# EAGLE board ps_723_reber_si2 (EAGLE 7.2.0)
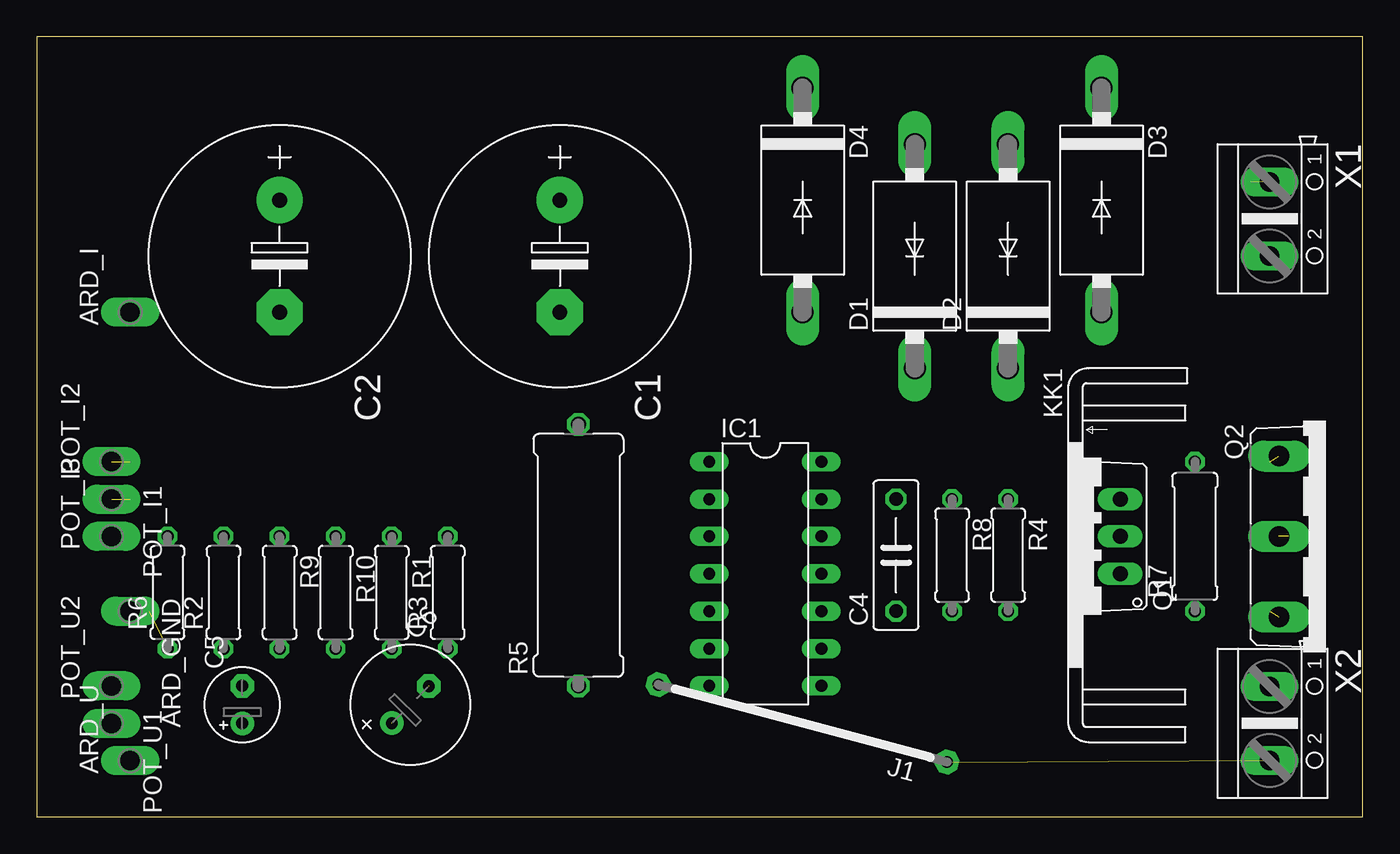
[diagram p0: board, top side]
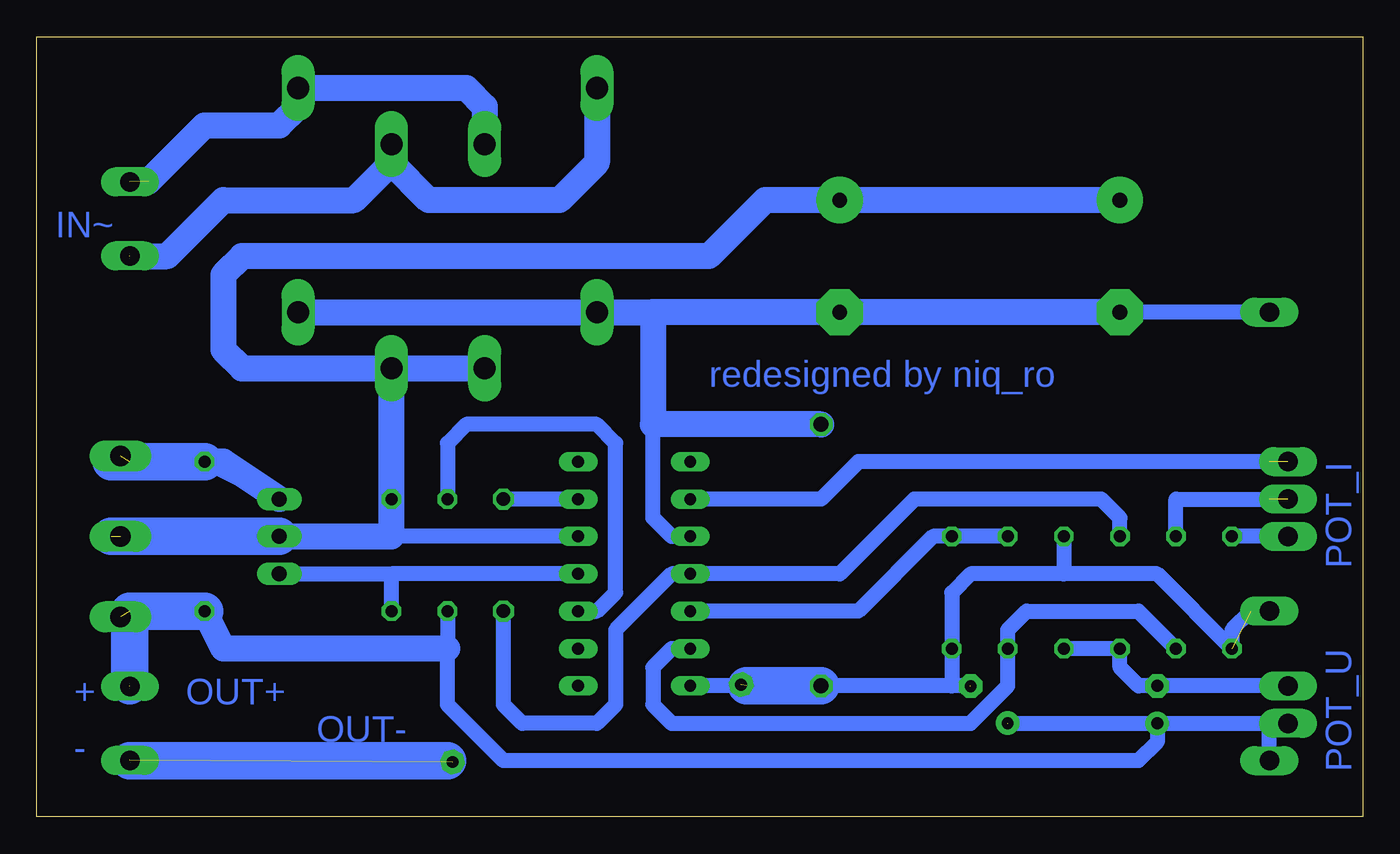
[diagram p1: board, bottom side, seen from below]

Size 90.15 x 53.01 mm. Coordinates in mm from the lower left corner, seen from the top.
Outline: 0,0 90.15,0 90.15,53.01 0,53.01 0,0
Copper layers (1*16): Top 0.035mm / dielectric 1.5mm / Bottom 0.035mm
Design rules "default": minimum track width 10mil, minimum drill 24mil, track to track 8mil, track to pad 8mil, pad to pad 8mil, via to via 8mil, smd to smd 8mil, copper to edge 40mil, drill to drill 8mil, minimum pad ring 10mil, minimum via ring 8mil, stop-mask expansion 4mil, vias tented up to drill 0mil, thermal gap 10mil

## Footprints (pad centres in the part's own frame; a part is rotated, then mirrored left to right if it is on the bottom)
P1-13Y = drill 1.321 pad 1.905 long: TP 0,0
E7,5-18 = drill 1.016 pad 3.15: + -3.81,0 | drill 1.016 pad 3.15 octagon: - 3.81,0
C075-032X103 = drill 0.914 octagon: 1 -3.81,0; 2 3.81,0
E2,5-5 = drill 0.813 pad 1.6: + -1.27,0 | drill 0.813 pad 1.6 octagon: - 1.27,0
E3,5-8 = drill 0.813 pad 1.6: + -1.778,0 | drill 0.813 pad 1.6 octagon: - 1.778,0
DO201-15 = drill 1.499 long: A 7.62,0; C -7.62,0
DIL14 = drill 0.813 long: 1 -7.62,-3.81; 2 -5.08,-3.81; 3 -2.54,-3.81; 4 0,-3.81; 5 2.54,-3.81; 6 5.08,-3.81; 7 7.62,-3.81; 8 7.62,3.81; 9 5.08,3.81; 10 2.54,3.81; 11 0,3.81; 12 -2.54,3.81; 13 -5.08,3.81; 14 -7.62,3.81
20 = drill 0.813 pad 1.6 octagon: 1 -10.16,0; 2 10.16,0
TO220AV = drill 1.016 long: B -2.54,-2.54; C 0,-2.54; E 2.54,-2.54
TOP3AV = drill 1.397 long: B -5.461,-3.175; C 0,-3.175; E 5.461,-3.175
0207/7 = drill 0.813 octagon: 1 -3.81,0; 2 3.81,0
0617/17 = drill 1.016 octagon: 1 -8.89,0; 2 8.89,0
0309/10 = drill 0.813 octagon: 1 -5.08,0; 2 5.08,0
AK500/2 = drill 1.321 long: 1 -2.515,0; 2 2.515,0

## Placement (x,y rotation side)
ARD_GND  PTR1PAD1-13Y  [P1-13Y]  6.35,13.97 270 top
ARD_I  PTR1PAD1-13Y  [P1-13Y]  6.35,34.29 90 top
ARD_U  PTR1PAD1-13Y  [P1-13Y]  6.35,3.81 90 top
C1  [E7,5-18]  35.56,38.1 270 top
C2  [E7,5-18]  16.51,38.1 270 top
C4  [C075-032X103]  58.42,17.78 90 top
C5  [E2,5-5]  13.97,7.62 90 top
C6  [E3,5-8]  25.4,7.62 45 top
D1  1N5408  [DO201-15]  59.69,38.1 90 top
D2  1N5408  [DO201-15]  66.04,38.1 90 top
D3  1N5408  [DO201-15]  72.39,41.91 270 top
D4  1N5408  [DO201-15]  52.07,41.91 270 top
IC1  LM723N  [DIL14]  49.53,16.51 270 top
J1  J20MM  [20]  52.07,6.35 165 top
KK1  FK209  [FK209]  71.12,17.78 270 top
POT_I1  PTR1PAD1-13Y  [P1-13Y]  5.08,21.59 270 top
POT_I2  PTR1PAD1-13Y  [P1-13Y]  5.08,24.13 90 top
POT_I3  PTR1PAD1-13Y  [P1-13Y]  5.08,19.05 90 top
POT_U1  PTR1PAD1-13Y  [P1-13Y]  5.08,6.35 270 top
POT_U2  PTR1PAD1-13Y  [P1-13Y]  5.08,8.89 90 top
Q1  TIP41C  [TO220AV]  71.12,19.05 90 top
Q2  TIP3055  [TOP3AV]  87.63,19.05 270 top
R1  10k  [0207/7]  24.13,15.24 270 top
R2  4k7  [0207/7]  12.7,15.24 90 top
R3  1k5  [0207/7]  27.94,15.24 90 top
R4  [0207/7]  66.04,17.78 270 top
R5  0R15  [0617/17]  36.83,17.78 90 top
R6  68  [0207/7]  8.89,15.24 90 top
R7  68  [0309/10]  78.74,19.05 90 top
R8  220  [0207/7]  62.23,17.78 270 top
R9  [0207/7]  16.51,15.24 270 top
R10  330  [0207/7]  20.32,15.24 270 top
X1  [AK500/2]  83.82,40.64 270 top
X2  [AK500/2]  83.82,6.35 270 top

## Library data of the parts
ARD_GND ARD_I ARD_U POT_I1-POT_I3 POT_U1 POT_U2 = testpad
C1 C2 C4-C6 R1-R10 = rcl
D1-D4 = diode
IC1 = linear
J1 = jumper
KK1 = heatsink
Q1 Q2 = transistor-power
X1 X2 = con-ptr500; OC_FARNELL: unknown; OC_NEWARK: unknown

## Nets
N$1: IC1.6 R1.2 R2.1
N$2: POT_I3.TP R6.2
N$3: C4.1 IC1.4 R9.1
N$4: IC1.2 POT_I2.TP
N$5: ARD_I.TP C1.- C2.- D3.A D4.A IC1.3 R5.2
N$6: C4.2 IC1.13
N$7: ARD_GND.TP C6.- IC1.7 J1.2 R3.1 R5.1 R6.1 R10.1
N$8: IC1.5 R1.1 R3.2
N$9: POT_I1.TP R2.2
N$10: IC1.10 R8.1
N$11: C5.- POT_U2.TP R9.2 R10.2
N$12: ARD_U.TP C5.+ C6.+ POT_U1.TP Q2.E R7.1 R8.2 X2.1
N$13: IC1.11 Q1.B R4.2
N$14: C1.+ C2.+ D1.C D2.C IC1.12 Q1.C Q2.C R4.1
N$15: J1.1 X2.2
N$16: Q1.E Q2.B R7.2
N$19: D2.A D4.C X1.2
N$20: D1.A D3.C X1.1

## Tracks (layer width: path | path; a pad name or v marks a point on that pad's centre or on a via)
N$1
  Bottom 1.016: IC1.6 46.99,11.43 48.26,10.16 48.26,7.62 46.99,6.35 26.67,6.35 24.13,8.89 R1.2 24.13,12.7 22.86,13.97 15.24,13.97 R2.1
N$2
  Bottom 1.016: POT_I3.TP R6.2
N$3
  Bottom 1.016: R9.1 16.51,20.32 17.78,21.59 30.48,21.59 35.56,16.51 IC1.4 46.99,16.51 50.8,12.7 50.8,7.62 52.07,6.35 57.15,6.35 58.42,7.62 C4.1
N$4  (1 unrouted)
  Bottom 1.016: 6.35,24.13 34.29,24.13 36.83,21.59 IC1.2
N$5
  Bottom 1.016: IC1.3 46.99,19.05 48.26,20.32 48.26,26.67 | ARD_I.TP C2.-
  Bottom 1.778: D3.A D4.A 48.26,34.29 | C2.- C1.- 48.26,34.29 | 48.26,34.29 48.26,26.67 R5.2
N$6
  Bottom 1.016: IC1.13 57.15,21.59 C4.2
N$7  (3 unrouted)
  Bottom 1.016: 41.91,8.89 IC1.7 | 27.94,8.89 R3.1 27.94,15.24 26.67,16.51 20.32,16.51 | 27.94,8.89 R5.1 | R10.1 20.32,16.51 | 20.32,16.51 13.97,16.51 R6.1 8.89,12.7 7.62,13.97 ARD_GND.TP | C6.- 27.94,8.89
  Bottom 2.54: 41.91,8.89 R5.1
N$8
  Bottom 1.016: R1.1 R3.2 29.21,19.05 34.29,13.97 IC1.5
N$9  (1 unrouted)
  Bottom 1.016: R2.2 12.7,21.59 6.35,21.59
N$10
  Bottom 1.016: IC1.10 52.07,13.97 50.8,15.24 50.8,25.4 52.07,26.67 60.96,26.67 62.23,25.4 R8.1
N$11
  Bottom 1.016: R10.2 R9.2 16.51,10.16 15.24,8.89 C5.- POT_U2.TP
N$12  (3 unrouted)
  Bottom 1.016: R8.2 62.23,11.43 62.23,7.62 58.42,3.81 15.24,3.81 13.97,5.08 C5.+ | C5.+ 6.35,6.35 | C6.+ C5.+ | ARD_U.TP 6.35,6.35 | 6.35,6.35 POT_U1.TP
  Bottom 1.778: 62.23,11.43 77.47,11.43 R7.1
  Bottom 2.54: R7.1 83.82,13.97 83.82,8.89
N$13
  Bottom 1.016: IC1.11 66.04,16.51 | R4.2 66.04,16.51 | Q1.B 66.04,16.51
N$14  (1 unrouted)
  Bottom 1.016: IC1.12 66.04,19.05
  Bottom 1.778: D2.C R4.1 66.04,19.05 Q1.C | D2.C D1.C | C2.+ C1.+ 40.64,41.91 44.45,38.1 76.2,38.1 77.47,36.83 77.47,31.75 76.2,30.48 D2.C
  Bottom 2.54: Q1.C 85.09,19.05
N$15  (1 unrouted)
N$16  (1 unrouted)
  Bottom 1.016: 83.82,24.13 82.55,24.13 | R7.2 Q1.E
  Bottom 1.778: Q1.E 77.47,24.13 R7.2 82.55,24.13 85.09,24.13
  Bottom 2.54: 85.09,24.13 R7.2
N$17
  Bottom 2.54: 62.23,3.81 83.82,3.81
N$19  (1 unrouted)
  Bottom 1.778: 83.82,38.1 81.28,38.1 77.47,41.91 68.58,41.91 66.04,44.45 | D4.C 52.07,44.45 54.61,41.91 63.5,41.91 66.04,44.45 | 66.04,44.45 D2.A
N$20  (1 unrouted)
  Bottom 1.778: 82.55,43.18 78.74,46.99 73.66,46.99 72.39,48.26 D3.C 60.96,49.53 59.69,48.26 D1.A

## Text on the board
Bottom: IN~ | redesigned by niq_ro | POT_I | POT_U | OUT+ | + | OUT- | -